# Altium PCB modFOC_ESC.PcbDoc (part 2 of 3)
Units mm, origin at the board's own origin, x right, y up, seen from the top; angles counter-clockwise.
Board outline 99.06 x 55.88 mm, 4 copper layers (Top Layer, Mid Layer 1, Mid Layer 2, Bottom Layer), stack 1.531 mm thick; 183 components, 125 nets, 799 pads, 484 vias.
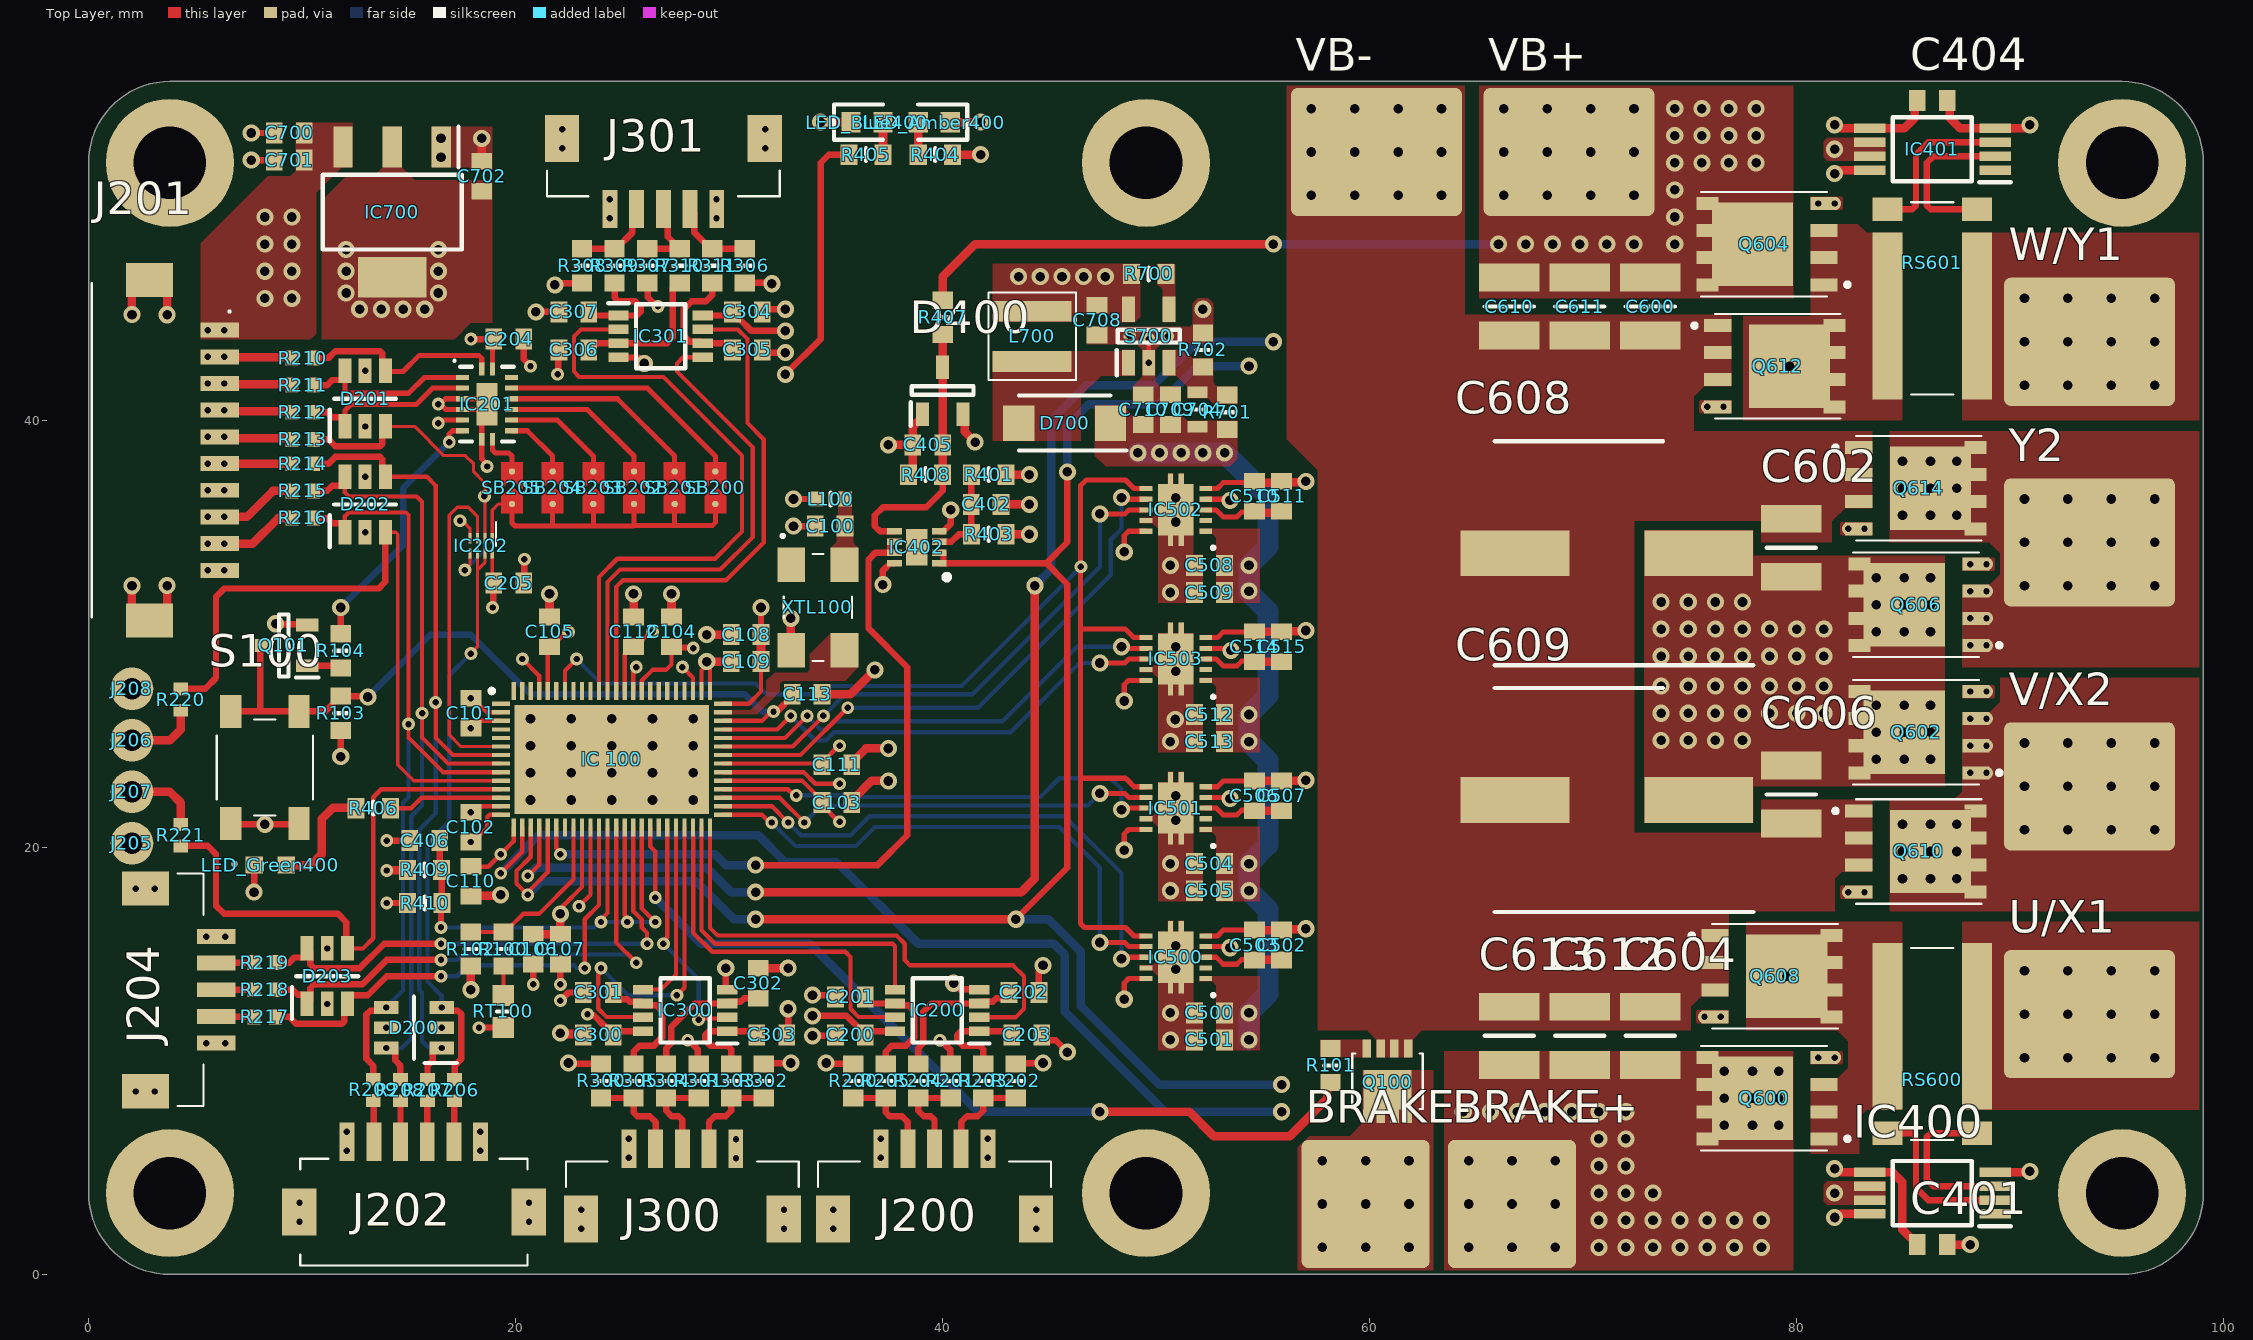
[diagram p0: Top Layer view]

## Via types
v1: diameter 0.8, hole 0.45, Top Layer to Bottom Layer, tented both sides, 308 vias
v2: diameter 0.6, hole 0.3, Top Layer to Bottom Layer, tented both sides, 176 vias

## Nets (pads, with @x,y where several pads share a name; then routed paths per layer and width w, separated by ;. In a path a pad name is that pad's centre, name@x,y a point inside that pad or via, vN(x,y) a via of type N, cw(c..) or ccw(c..) an arc to the next point about the centre after c; other vN are vias at no path point) (continued)
CS_bin_0: D201.4 IC201.1 R210.1 | length 9.7
  Top Layer w0.24: D201.4@13.904,42.321 13.934,42.291 14.732,42.291 15.494,43.053 18.274,43.053 18.415,42.912 IC201.1@18.415,42.418
  Top Layer w0.3: R210.1@10.533,42.926 11.239,42.926 11.559,43.246 13.65,43.246 13.754,43.142 13.754,42.471 D201.4@13.904,42.321
CS_bin_1: D201.6 IC201.2 R211.1 | length 8.8
  Top Layer w0.24: D201.6@11.854,42.046 11.854,42.171 D201.6@12.004,42.321 12.004,42.046 12.004,41.416 12.145,41.275 14.986,41.275 15.729,42.018 IC201.2@17.515,42.018
  Top Layer w0.3: R211.1@10.533,41.656 11.176,41.656 11.416,41.896 11.854,41.896 D201.6@12.004,42.046
CS_bin_2: D201.1 IC201.3 R212.1 | length 8.3
  Top Layer w0.24: D201.1@12.004,39.721 12.004,39.996 12.004,40.146 12.004,40.464 12.296,40.756 15.356,40.756 16.118,41.518 IC201.3@17.515,41.518
  Top Layer w0.3: R212.1@10.533,40.386 11.176,40.386 11.416,40.146 11.854,40.146 D201.1@12.004,39.996
CS_H_range: D201.3 IC202.2 IC202.5 R213.1 | length 17.6
  Top Layer w0.15: D201.3@13.904,39.721 15.269,39.721 16.636,38.354 17.653,38.354 18.034,37.973 18.034,37.591 18.475,37.15 18.563,37.062 18.563,36.47 v2(18.542,36.449) 18.563,36.428 IC202.2@18.563,34.486 ; v2(17.626,32.993) 17.863,33.23 IC202.5@17.863,33.786
  Top Layer w0.3: R213.1@10.533,39.116 11.239,39.116 11.559,38.796 13.65,38.796 13.754,38.9 13.754,39.571 D201.3@13.904,39.721
  Bottom Layer w0.15: v2(17.626,32.993) 18.542,33.909 v2(18.542,36.449)
EN_GD: "IC 100.70" IC500.6 IC501.6 IC502.6 IC503.6 | length 62
  Top Layer w0.2: 22.311,27.33 22.311,28.28 v2(22.86,28.829)
  Top Layer w0.24: 46.482,23.241 48.576,23.241 ; 46.482,30.226 48.576,30.226 48.973,29.829 IC503.6@49.527,29.829 ; 48.638,23.179 48.973,22.844 IC501.6@49.527,22.844 ; IC500.6@49.527,15.859 48.973,15.859 48.576,16.256 46.654,16.256 46.466,16.444 46.466,33.131 v2(46.482,33.147) 46.466,33.163 46.466,36.941 46.736,37.211 48.576,37.211 48.973,36.814 IC502.6@49.527,36.814
  Bottom Layer w0.2: v2(22.86,28.829) 24.003,27.686 31.242,27.686 31.75,27.178 34.417,27.178 34.798,27.559 40.894,27.559 v2(46.482,33.147)
ENC1.A: "IC 100.35" IC300.7 | length 16.3
  Top Layer w0.2: v2(24.003,14.351) 23.926,14.274 23.926,14.084 23.876,14.034 23.876,12.446 24.257,12.065 25.944,12.065 IC300.7@25.965,12.044 ; v2(27.559,13.081) 27.911,13.433 27.911,20.93
  Bottom Layer w0.2: v2(24.003,14.351) 25.273,13.081 v2(27.559,13.081)
ENC1.B: "IC 100.34" IC300.5 | length 8.7
  Top Layer w0.2: IC300.5@25.965,13.344 26.806,13.344 27.511,14.049 27.511,20.93
ENC1.N: "IC 100.33" IC300.2 | length 11.1
  Top Layer w0.2: v2(26.924,15.494) 26.924,15.602 27.111,15.789 27.111,20.93 ; v2(28.575,11.938) 28.628,11.991 29.862,11.991 IC300.2@29.915,12.044
  Bottom Layer w0.2: v2(26.924,15.494) 28.575,13.843 v2(28.575,11.938)
ENC1_A_5V: C303.1 IC300.1 R303.1 | length 5.1
  Top Layer w0.3: R303.1@30.099,9.867 30.099,10.542 29.923,10.718 29.132,10.718 28.88,10.97 28.88,11.218 29.056,11.394 31.201,11.394 31.369,11.226 C303.1@31.369,11.126
ENC1_A_IN: J300.4 R302.1 R303.2 | length 4.6
  Top Layer w0.3: J300.4@29.063,5.898 29.063,7.142 29.209,7.288 29.337,7.416 29.845,7.416 30.099,7.67 R303.2@30.099,8.267 R302.1@31.623,8.267
ENC1_B_5V: C302.1 IC300.3 R304.1 | length 6.5
  Top Layer w0.3: R304.1@27.051,9.867 27.051,10.591 27.29,10.83 27.29,11.592 28.392,12.694 IC300.3@29.915,12.694 29.99,12.769 30.535,12.769 30.705,12.939 C302.1@31.369,12.939
ENC1_B_IN: J300.3 R301.1 R304.2 | length 4.4
  Top Layer w0.3: J300.3@27.813,5.898 27.813,7.24 27.637,7.416 27.305,7.416 27.051,7.67 R304.2@27.051,8.267 R301.1@28.575,8.267
ENC1_N_5V: C301.1 IC300.6 R305.1 | length 6.1
  Top Layer w0.3: C301.1@24.384,13.208 C301.1@24.624,13.448 ; C301.1@24.751,12.891 25.223,12.891 25.345,12.769 25.89,12.769 26.04,12.619 26.585,12.619 26.863,12.341 26.863,11.097 26.487,10.721 25.817,10.721 25.527,10.431 R305.1@25.527,9.867
ENC1_N_IN: J300.2 R300.1 R305.2 | length 4.7
  Top Layer w0.3: R300.1@24.003,8.267 R305.2@25.527,8.267 25.527,7.592 25.703,7.416 26.289,7.416 26.563,7.142 J300.2@26.563,5.898
ENC2.A: "IC 100.64" IC301.7 | length 24.8
  Top Layer w0.2: 24.711,27.33 24.711,32.204 25.019,32.512 29.845,32.512 31.623,34.29 31.623,39.116 30.861,39.878 30.861,43.815 30.409,44.267 IC301.7@28.772,44.267